# EAGLE board LEDBOARD_COMPILED (EAGLE 9.2.2)
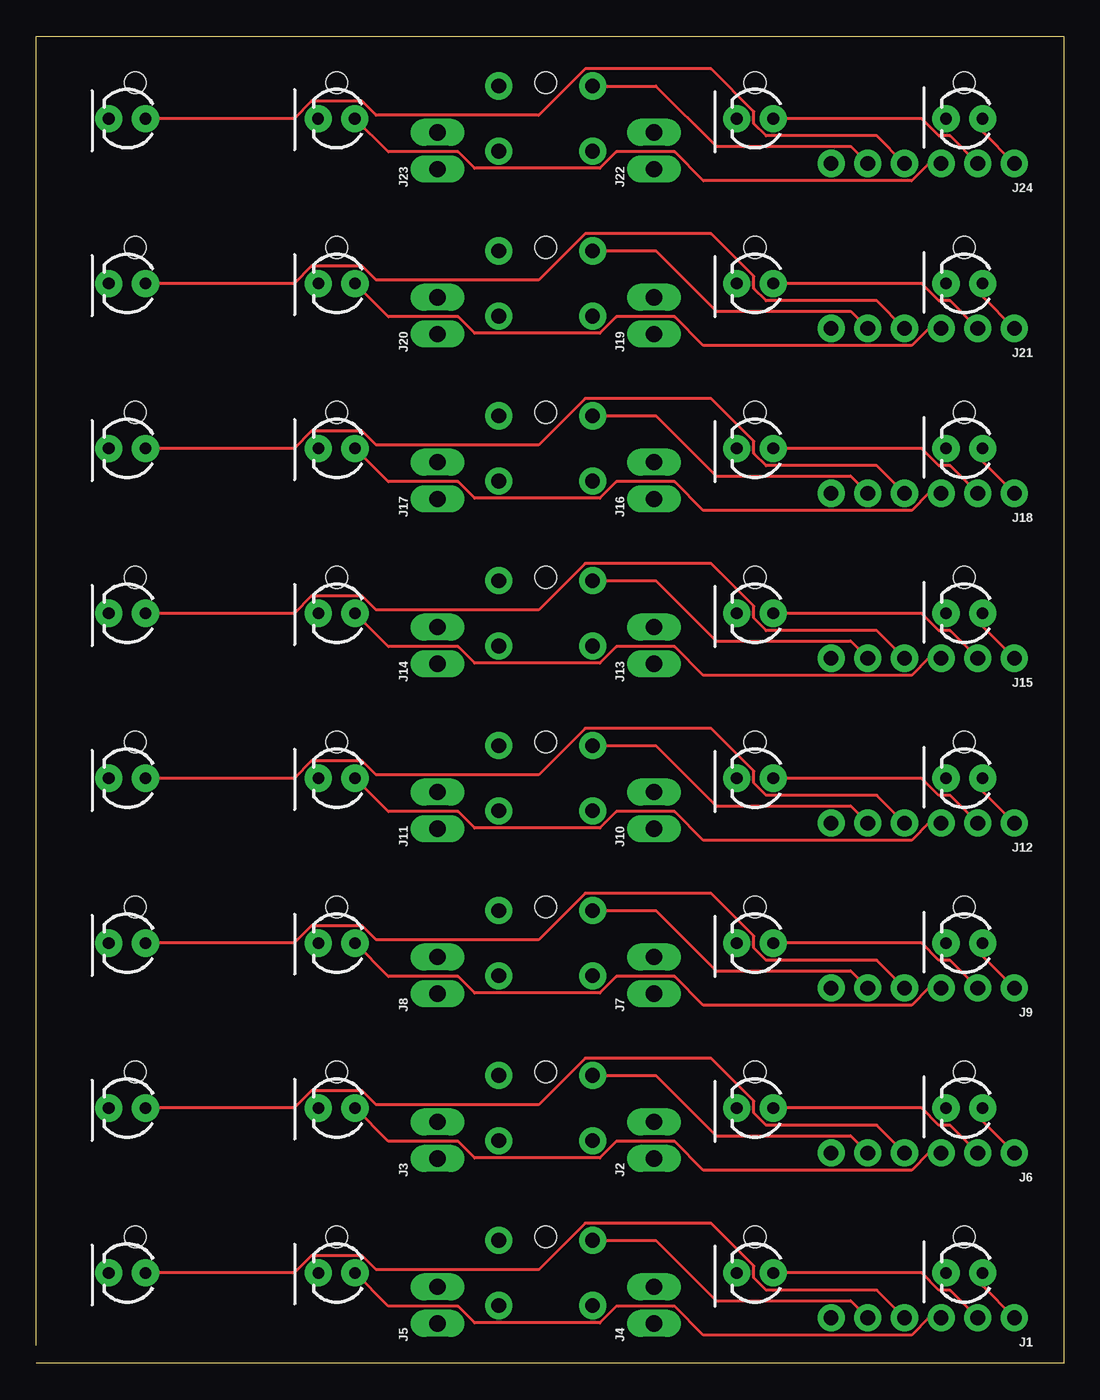
[diagram p0: board, top side]
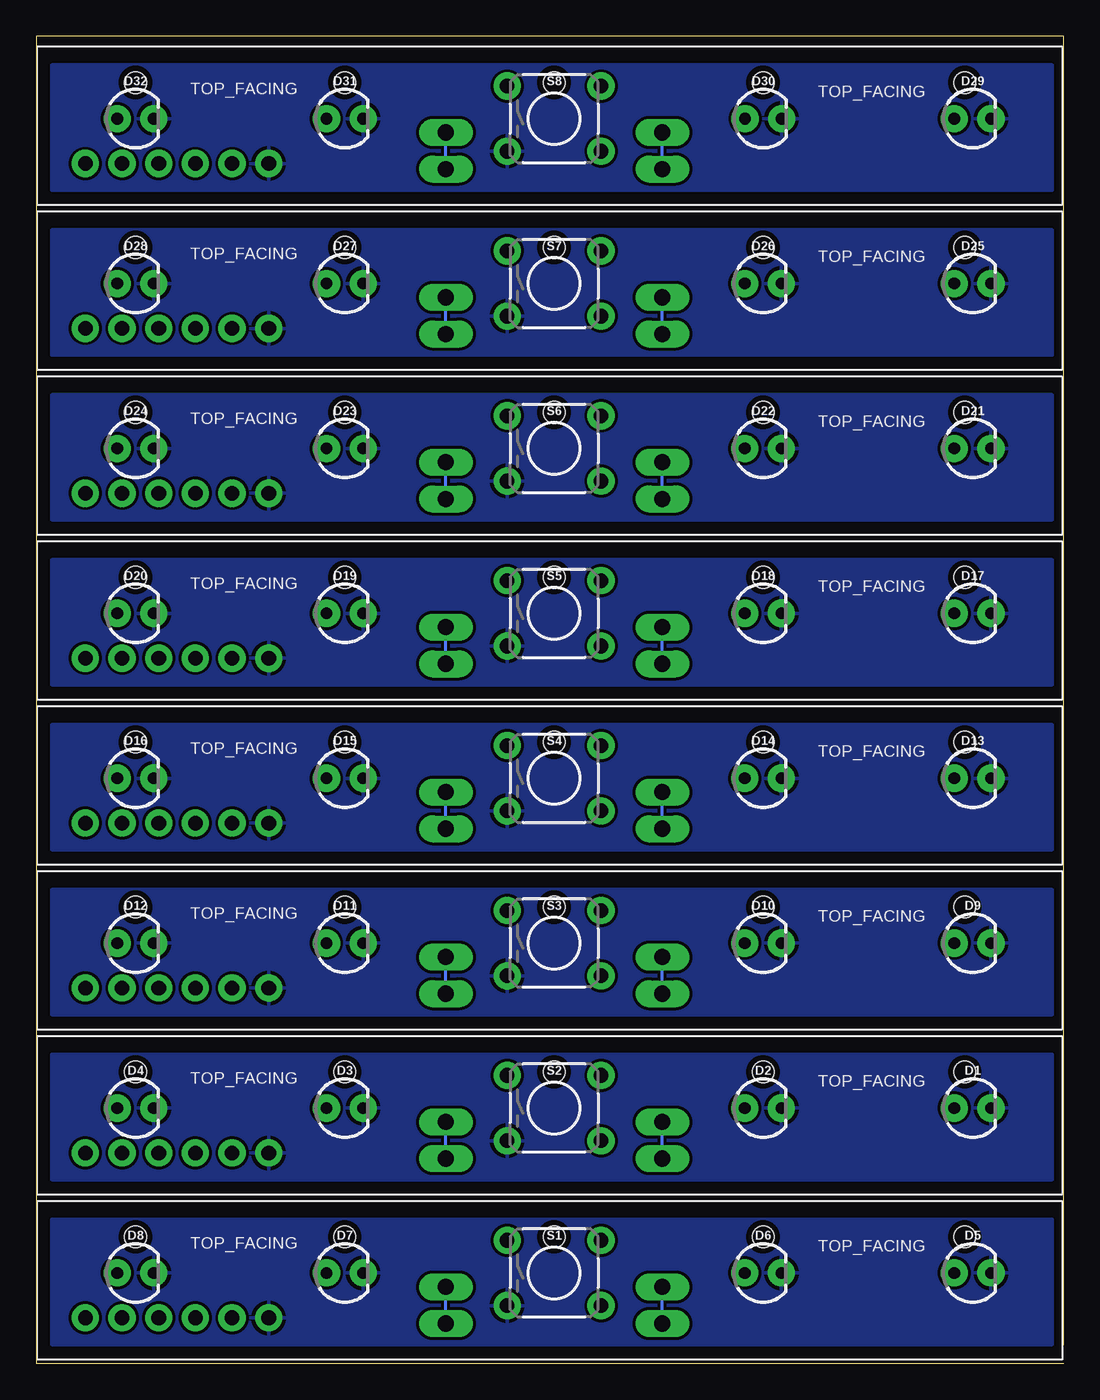
[diagram p1: board, bottom side, seen from below]

Size 71.2 x 92 mm. Coordinates in mm from the lower left corner, seen from the top.
Outline: 0,1.27 0,92 71.2,92 71.2,0 0,0
Copper layers (1*16): Top 0.035mm / dielectric 1.5mm / Bottom 0.035mm
Design rules "GT": minimum track width 8mil, minimum drill 0.3mm, track to track 8mil, track to pad 6mil, pad to pad 6mil, via to via 6mil, smd to smd 0mil, copper to edge 0.4mm, drill to drill 10mil, minimum pad ring 10mil, minimum via ring 6mil, stop-mask expansion 2mil, vias tented up to drill 25mil, thermal gap 10mil

## Footprints (pad centres in the part's own frame; a part is rotated, then mirrored left to right if it is on the bottom)
LED_3MM = drill 0.813 pad 1.88: A -1.27,0; K 1.27,0
1X06_NO_SILK = drill 1.016 pad 1.88: 1 0,0; 2 2.54,0; 3 5.08,0; 4 7.62,0; 5 10.16,0; 6 12.7,0
1X02_LONGPADS = drill 1.118 pad 1.88 long: 1 0,0; 2 2.54,0
TACTILE_SWITCH_PTH_6.0MM = drill 1.016 pad 1.88: 1 -3.251,2.261; 2 3.251,2.261; 3 -3.251,-2.261; 4 3.251,-2.261
HOLD = hole 1.5: 0,0

## Placement (x,y rotation side)
D1  [LED_3MM]  6.31,17.7 0 bottom
D2  [LED_3MM]  20.83,17.7 0 bottom
D3  [LED_3MM]  49.81,17.7 0 bottom
D4  [LED_3MM]  64.31,17.7 0 bottom
D5  [LED_3MM]  6.31,6.27 0 bottom
D6  [LED_3MM]  20.83,6.27 0 bottom
D7  [LED_3MM]  49.81,6.27 0 bottom
D8  [LED_3MM]  64.31,6.27 0 bottom
D9  [LED_3MM]  6.31,29.13 0 bottom
D10  [LED_3MM]  20.83,29.13 0 bottom
D11  [LED_3MM]  49.81,29.13 0 bottom
D12  [LED_3MM]  64.31,29.13 0 bottom
D13  [LED_3MM]  6.31,40.56 0 bottom
D14  [LED_3MM]  20.83,40.56 0 bottom
D15  [LED_3MM]  49.81,40.56 0 bottom
D16  [LED_3MM]  64.31,40.56 0 bottom
D17  [LED_3MM]  6.31,51.99 0 bottom
D18  [LED_3MM]  20.83,51.99 0 bottom
D19  [LED_3MM]  49.81,51.99 0 bottom
D20  [LED_3MM]  64.31,51.99 0 bottom
D21  [LED_3MM]  6.31,63.42 0 bottom
D22  [LED_3MM]  20.83,63.42 0 bottom
D23  [LED_3MM]  49.81,63.42 0 bottom
D24  [LED_3MM]  64.31,63.42 0 bottom
D25  [LED_3MM]  6.31,74.85 0 bottom
D26  [LED_3MM]  20.83,74.85 0 bottom
D27  [LED_3MM]  49.81,74.85 0 bottom
D28  [LED_3MM]  64.31,74.85 0 bottom
D29  [LED_3MM]  6.31,86.28 0 bottom
D30  [LED_3MM]  20.81,86.28 0 bottom
D31  [LED_3MM]  49.81,86.28 0 bottom
D32  [LED_3MM]  64.31,86.28 0 bottom
J1  [1X06_NO_SILK]  67.78,3.16 180 top
J2  [1X02_LONGPADS]  42.81,14.2 90 top
J3  [1X02_LONGPADS]  27.81,14.2 90 top
J4  [1X02_LONGPADS]  42.81,2.77 90 top
J5  [1X02_LONGPADS]  27.81,2.77 90 top
J6  [1X06_NO_SILK]  67.78,14.59 180 top
J7  [1X02_LONGPADS]  42.81,25.63 90 top
J8  [1X02_LONGPADS]  27.81,25.63 90 top
J9  [1X06_NO_SILK]  67.78,26.02 180 top
J10  [1X02_LONGPADS]  42.81,37.06 90 top
J11  [1X02_LONGPADS]  27.81,37.06 90 top
J12  [1X06_NO_SILK]  67.78,37.45 180 top
J13  [1X02_LONGPADS]  42.81,48.49 90 top
J14  [1X02_LONGPADS]  27.81,48.49 90 top
J15  [1X06_NO_SILK]  67.78,48.88 180 top
J16  [1X02_LONGPADS]  42.81,59.92 90 top
J17  [1X02_LONGPADS]  27.81,59.92 90 top
J18  [1X06_NO_SILK]  67.78,60.31 180 top
J19  [1X02_LONGPADS]  42.81,71.35 90 top
J20  [1X02_LONGPADS]  27.81,71.35 90 top
J21  [1X06_NO_SILK]  67.78,71.74 180 top
J22  [1X02_LONGPADS]  42.81,82.78 90 top
J23  [1X02_LONGPADS]  27.81,82.78 90 top
J24  [1X06_NO_SILK]  67.78,83.17 180 top
S1  MOMENTARY-SWITCH-SPST-PTH-6.0MM  [TACTILE_SWITCH_PTH_6.0MM]  35.31,6.27 0 bottom
S2  MOMENTARY-SWITCH-SPST-PTH-6.0MM  [TACTILE_SWITCH_PTH_6.0MM]  35.31,17.7 0 bottom
S3  MOMENTARY-SWITCH-SPST-PTH-6.0MM  [TACTILE_SWITCH_PTH_6.0MM]  35.31,29.13 0 bottom
S4  MOMENTARY-SWITCH-SPST-PTH-6.0MM  [TACTILE_SWITCH_PTH_6.0MM]  35.31,40.56 0 bottom
S5  MOMENTARY-SWITCH-SPST-PTH-6.0MM  [TACTILE_SWITCH_PTH_6.0MM]  35.31,51.99 0 bottom
S6  MOMENTARY-SWITCH-SPST-PTH-6.0MM  [TACTILE_SWITCH_PTH_6.0MM]  35.31,63.42 0 bottom
S7  MOMENTARY-SWITCH-SPST-PTH-6.0MM  [TACTILE_SWITCH_PTH_6.0MM]  35.31,74.85 0 bottom
S8  MOMENTARY-SWITCH-SPST-PTH-6.0MM  [TACTILE_SWITCH_PTH_6.0MM]  35.31,86.28 0 bottom
U$1  [HOLD]  6.86,20.2 0 top
U$2  [HOLD]  20.83,20.2 0 top
U$3  [HOLD]  49.81,20.2 0 top
U$4  [HOLD]  64.31,20.2 0 top
U$5  [HOLD]  35.31,20.2 0 top
U$6  [HOLD]  6.86,31.63 0 top
U$7  [HOLD]  20.83,31.63 0 top
U$8  [HOLD]  49.81,31.63 0 top
U$9  [HOLD]  64.31,31.63 0 top
U$10  [HOLD]  35.31,31.63 0 top
U$11  [HOLD]  6.86,43.06 0 top
U$12  [HOLD]  20.83,43.06 0 top
U$13  [HOLD]  49.81,43.06 0 top
U$14  [HOLD]  64.31,43.06 0 top
U$15  [HOLD]  6.86,8.77 0 top
U$16  [HOLD]  20.83,8.77 0 top
U$17  [HOLD]  49.81,8.77 0 top
U$18  [HOLD]  64.31,8.77 0 top
U$19  [HOLD]  35.31,43.06 0 top
U$20  [HOLD]  6.86,54.49 0 top
U$21  [HOLD]  20.83,54.49 0 top
U$22  [HOLD]  49.81,54.49 0 top
U$23  [HOLD]  35.31,8.77 0 top
U$24  [HOLD]  64.31,54.49 0 top
U$25  [HOLD]  35.31,54.49 0 top
U$26  [HOLD]  6.86,65.92 0 top
U$27  [HOLD]  20.83,65.92 0 top
U$28  [HOLD]  49.81,65.92 0 top
U$29  [HOLD]  64.31,65.92 0 top
U$30  [HOLD]  35.31,65.92 0 top
U$31  [HOLD]  6.86,77.35 0 top
U$32  [HOLD]  20.83,77.35 0 top
U$33  [HOLD]  49.81,77.35 0 top
U$34  [HOLD]  64.31,77.35 0 top
U$35  [HOLD]  35.31,77.35 0 top
U$36  [HOLD]  6.86,88.78 0 top
U$37  [HOLD]  20.83,88.78 0 top
U$38  [HOLD]  49.81,88.78 0 top
U$39  [HOLD]  64.31,88.78 0 top
U$40  [HOLD]  35.31,88.78 0 top

## Library data of the parts
D1-D32 = SparkFun-LED; PROD_ID: DIO-08794
J1 J6 J9 J12 J15 J18 J21 J24 = GT_Connectors; PROD_ID: CONN-08437
J2-J5 J7 J8 J10 J11 J13 J14 J16 J17 J19 J20 J22 J23 = GT_Connectors
S1-S8 = SparkFun-Switches; PROD_ID: SWCH-08441; SF_SKU: COM-00097
U$1-U$40 = fv-1consolidated

## Nets
N$1: D4.A J6.1
N$2: D3.A J6.2
N$3: D2.A J6.3
N$4: D1.A J6.4
N$5: D1.K D2.K D3.K D4.K J6.6 S2.3
N$6: J2.1 J2.2
N$7: J3.1 J3.2
N$8: J6.5 S2.1
N$9: D12.A J9.1
N$10: D11.A J9.2
N$11: D10.A J9.3
N$12: D9.A J9.4
N$13: D9.K D10.K D11.K D12.K J9.6 S3.3
N$14: J7.1 J7.2
N$15: J8.1 J8.2
N$16: J9.5 S3.1
N$17: D16.A J12.1
N$18: D15.A J12.2
N$19: D14.A J12.3
N$20: D13.A J12.4
N$21: D13.K D14.K D15.K D16.K J12.6 S4.3
N$22: J10.1 J10.2
N$23: J11.1 J11.2
N$24: J12.5 S4.1
N$25: D20.A J15.1
N$26: D19.A J15.2
N$27: D18.A J15.3
N$28: D17.A J15.4
N$29: D17.K D18.K D19.K D20.K J15.6 S5.3
N$30: J13.1 J13.2
N$31: D5.K D6.K D7.K D8.K J1.6 S1.3
N$32: D8.A J1.1
N$33: D7.A J1.2
N$34: D6.A J1.3
N$35: D5.A J1.4
N$36: J1.5 S1.1
N$37: J4.1 J4.2
N$38: J5.1 J5.2
N$39: J14.1 J14.2
N$40: J15.5 S5.1
N$41: D24.A J18.1
N$42: D23.A J18.2
N$43: D22.A J18.3
N$44: D21.A J18.4
N$45: D21.K D22.K D23.K D24.K J18.6 S6.3
N$46: J16.1 J16.2
N$47: J17.1 J17.2
N$48: J18.5 S6.1
N$49: D28.A J21.1
N$50: D27.A J21.2
N$51: D26.A J21.3
N$52: D25.A J21.4
N$53: D25.K D26.K D27.K D28.K J21.6 S7.3
N$54: J19.1 J19.2
N$55: J20.1 J20.2
N$56: J21.5 S7.1
N$57: D32.A J24.1
N$58: D31.A J24.2
N$59: D30.A J24.3
N$60: D29.A J24.4
N$61: D29.K D30.K D31.K D32.K J24.6 S8.3
N$62: J22.1 J22.2
N$63: J23.1 J23.2
N$64: J24.5 S8.1

## Tracks (layer width: path | path; a pad name or v marks a point on that pad's centre or on a via)
N$1
  Top 0.203: J6.1 65.58,16.79 D4.A
N$2
  Top 0.203: J6.2 63.33,16.51 62.55,16.51 61.35,17.7 D3.A
N$3
  Top 0.203: J6.3 61.85,14.59 60.66,13.4 46.24,13.4 44.24,15.39 40.2,15.39 39.06,14.25 30.39,14.25 29.24,15.39 24.41,15.39 D2.A
N$4
  Top 0.203: D1.A 17.87,17.7 19.07,18.89 22.59,18.89 23.55,17.93 34.81,17.93 38.04,21.15 46.77,21.15 49.73,18.19 49.73,17.36 50.59,16.51 58.25,16.51 J6.4
N$5
  pour Bottom: 0.81,21.46 0.81,12.7 34.53,12.7 70.11,12.7 70.11,21.46
N$6
  Bottom 0.203: J2.1 J2.2
N$7
  Bottom 0.203: J3.1 J3.2
N$8
  Top 0.203: S2.1 42.94,19.96 47.12,15.78 56.43,15.78 J6.5
N$9
  Top 0.203: J9.1 65.58,28.22 D12.A
N$10
  Top 0.203: J9.2 63.33,27.94 62.55,27.94 61.35,29.13 D11.A
N$11
  Top 0.203: J9.3 61.85,26.02 60.66,24.83 46.24,24.83 44.24,26.82 40.2,26.82 39.06,25.68 30.39,25.68 29.24,26.82 24.41,26.82 D10.A
N$12
  Top 0.203: D9.A 17.87,29.13 19.07,30.32 22.59,30.32 23.55,29.36 34.81,29.36 38.04,32.58 46.77,32.58 49.73,29.62 49.73,28.79 50.59,27.94 58.25,27.94 J9.4
N$13
  pour Bottom: 0.81,32.89 0.81,24.13 34.53,24.13 70.11,24.13 70.11,32.89
N$14
  Bottom 0.203: J7.1 J7.2
N$15
  Bottom 0.203: J8.1 J8.2
N$16
  Top 0.203: S3.1 42.94,31.39 47.12,27.21 56.43,27.21 J9.5
N$17
  Top 0.203: J12.1 65.58,39.65 D16.A
N$18
  Top 0.203: J12.2 63.33,39.37 62.55,39.37 61.35,40.56 D15.A
N$19
  Top 0.203: J12.3 61.85,37.45 60.66,36.26 46.24,36.26 44.24,38.25 40.2,38.25 39.06,37.11 30.39,37.11 29.24,38.25 24.41,38.25 D14.A
N$20
  Top 0.203: D13.A 17.87,40.56 19.07,41.75 22.59,41.75 23.55,40.79 34.81,40.79 38.04,44.01 46.77,44.01 49.73,41.05 49.73,40.22 50.59,39.37 58.25,39.37 J12.4
N$21
  pour Bottom: 0.81,44.32 0.81,35.56 34.53,35.56 70.11,35.56 70.11,44.32
N$22
  Bottom 0.203: J10.1 J10.2
N$23
  Bottom 0.203: J11.1 J11.2
N$24
  Top 0.203: S4.1 42.94,42.82 47.12,38.64 56.43,38.64 J12.5
N$25
  Top 0.203: J15.1 65.58,51.08 D20.A
N$26
  Top 0.203: J15.2 63.33,50.8 62.55,50.8 61.35,51.99 D19.A
N$27
  Top 0.203: J15.3 61.85,48.88 60.66,47.69 46.24,47.69 44.24,49.68 40.2,49.68 39.06,48.54 30.39,48.54 29.24,49.68 24.41,49.68 D18.A
N$28
  Top 0.203: D17.A 17.87,51.99 19.07,53.18 22.59,53.18 23.55,52.22 34.81,52.22 38.04,55.44 46.77,55.44 49.73,52.48 49.73,51.65 50.59,50.8 58.25,50.8 J15.4
N$29
  pour Bottom: 0.81,55.75 0.81,46.99 34.53,46.99 70.11,46.99 70.11,55.75
N$30
  Bottom 0.203: J13.1 J13.2
N$31
  pour Bottom: 0.81,10.03 0.81,1.27 34.53,1.27 70.11,1.27 70.11,10.03
N$32
  Top 0.203: J1.1 65.58,5.36 D8.A
N$33
  Top 0.203: J1.2 63.33,5.08 62.55,5.08 61.35,6.27 D7.A
N$34
  Top 0.203: J1.3 61.85,3.16 60.66,1.97 46.24,1.97 44.24,3.96 40.2,3.96 39.06,2.82 30.39,2.82 29.24,3.96 24.41,3.96 D6.A
N$35
  Top 0.203: D5.A 17.87,6.27 19.07,7.46 22.59,7.46 23.55,6.5 34.81,6.5 38.04,9.72 46.77,9.72 49.73,6.76 49.73,5.93 50.59,5.08 58.25,5.08 J1.4
N$36
  Top 0.203: S1.1 42.94,8.53 47.12,4.35 56.43,4.35 J1.5
N$37
  Bottom 0.203: J4.1 J4.2
N$38
  Bottom 0.203: J5.1 J5.2
N$39
  Bottom 0.203: J14.1 J14.2
N$40
  Top 0.203: S5.1 42.94,54.25 47.12,50.07 56.43,50.07 J15.5
N$41
  Top 0.203: J18.1 65.58,62.51 D24.A
N$42
  Top 0.203: J18.2 63.33,62.23 62.55,62.23 61.35,63.42 D23.A
N$43
  Top 0.203: J18.3 61.85,60.31 60.66,59.12 46.24,59.12 44.24,61.11 40.2,61.11 39.06,59.97 30.39,59.97 29.24,61.11 24.41,61.11 D22.A
N$44
  Top 0.203: D21.A 17.87,63.42 19.07,64.61 22.59,64.61 23.55,63.65 34.81,63.65 38.04,66.87 46.77,66.87 49.73,63.91 49.73,63.08 50.59,62.23 58.25,62.23 J18.4
N$45
  pour Bottom: 0.81,67.18 0.81,58.42 34.53,58.42 70.11,58.42 70.11,67.18
N$46
  Bottom 0.203: J16.1 J16.2
N$47
  Bottom 0.203: J17.1 J17.2
N$48
  Top 0.203: S6.1 42.94,65.68 47.12,61.5 56.43,61.5 J18.5
N$49
  Top 0.203: J21.1 65.58,73.94 D28.A
N$50
  Top 0.203: J21.2 63.33,73.66 62.55,73.66 61.35,74.85 D27.A
N$51
  Top 0.203: J21.3 61.85,71.74 60.66,70.55 46.24,70.55 44.24,72.54 40.2,72.54 39.06,71.4 30.39,71.4 29.24,72.54 24.41,72.54 D26.A
N$52
  Top 0.203: D25.A 17.87,74.85 19.07,76.04 22.59,76.04 23.55,75.08 34.81,75.08 38.04,78.3 46.77,78.3 49.73,75.34 49.73,74.51 50.59,73.66 58.25,73.66 J21.4
N$53
  pour Bottom: 0.81,78.61 0.81,69.85 34.53,69.85 70.11,69.85 70.11,78.61
N$54
  Bottom 0.203: J19.1 J19.2
N$55
  Bottom 0.203: J20.1 J20.2
N$56
  Top 0.203: S7.1 42.94,77.11 47.12,72.93 56.43,72.93 J21.5
N$57
  Top 0.203: J24.1 65.58,85.37 D32.A
N$58
  Top 0.203: J24.2 63.33,85.09 62.55,85.09 61.35,86.28 D31.A
N$59
  Top 0.203: J24.3 61.85,83.17 60.66,81.98 46.24,81.98 44.24,83.97 40.2,83.97 39.06,82.83 30.39,82.83 29.24,83.97 24.41,83.97 D30.A
N$60
  Top 0.203: D29.A 17.87,86.28 19.07,87.47 22.59,87.47 23.55,86.51 34.81,86.51 38.04,89.73 46.77,89.73 49.73,86.77 49.73,85.94 50.59,85.09 58.25,85.09 J24.4
N$61
  pour Bottom: 0.81,90.04 0.81,81.28 34.53,81.28 70.11,81.28 70.11,90.04
N$62
  Bottom 0.203: J22.1 J22.2
N$63
  Bottom 0.203: J23.1 J23.2
N$64
  Top 0.203: S8.1 42.94,88.54 47.12,84.36 56.43,84.36 J24.5

## Text on the board
bNames: TOP_FACING | TOP_FACING | TOP_FACING | TOP_FACING | TOP_FACING | TOP_FACING | TOP_FACING | TOP_FACING | TOP_FACING | TOP_FACING | TOP_FACING | TOP_FACING | TOP_FACING | TOP_FACING | TOP_FACING | TOP_FACING